# EAGLE board untitled (EAGLE 9.6.2)
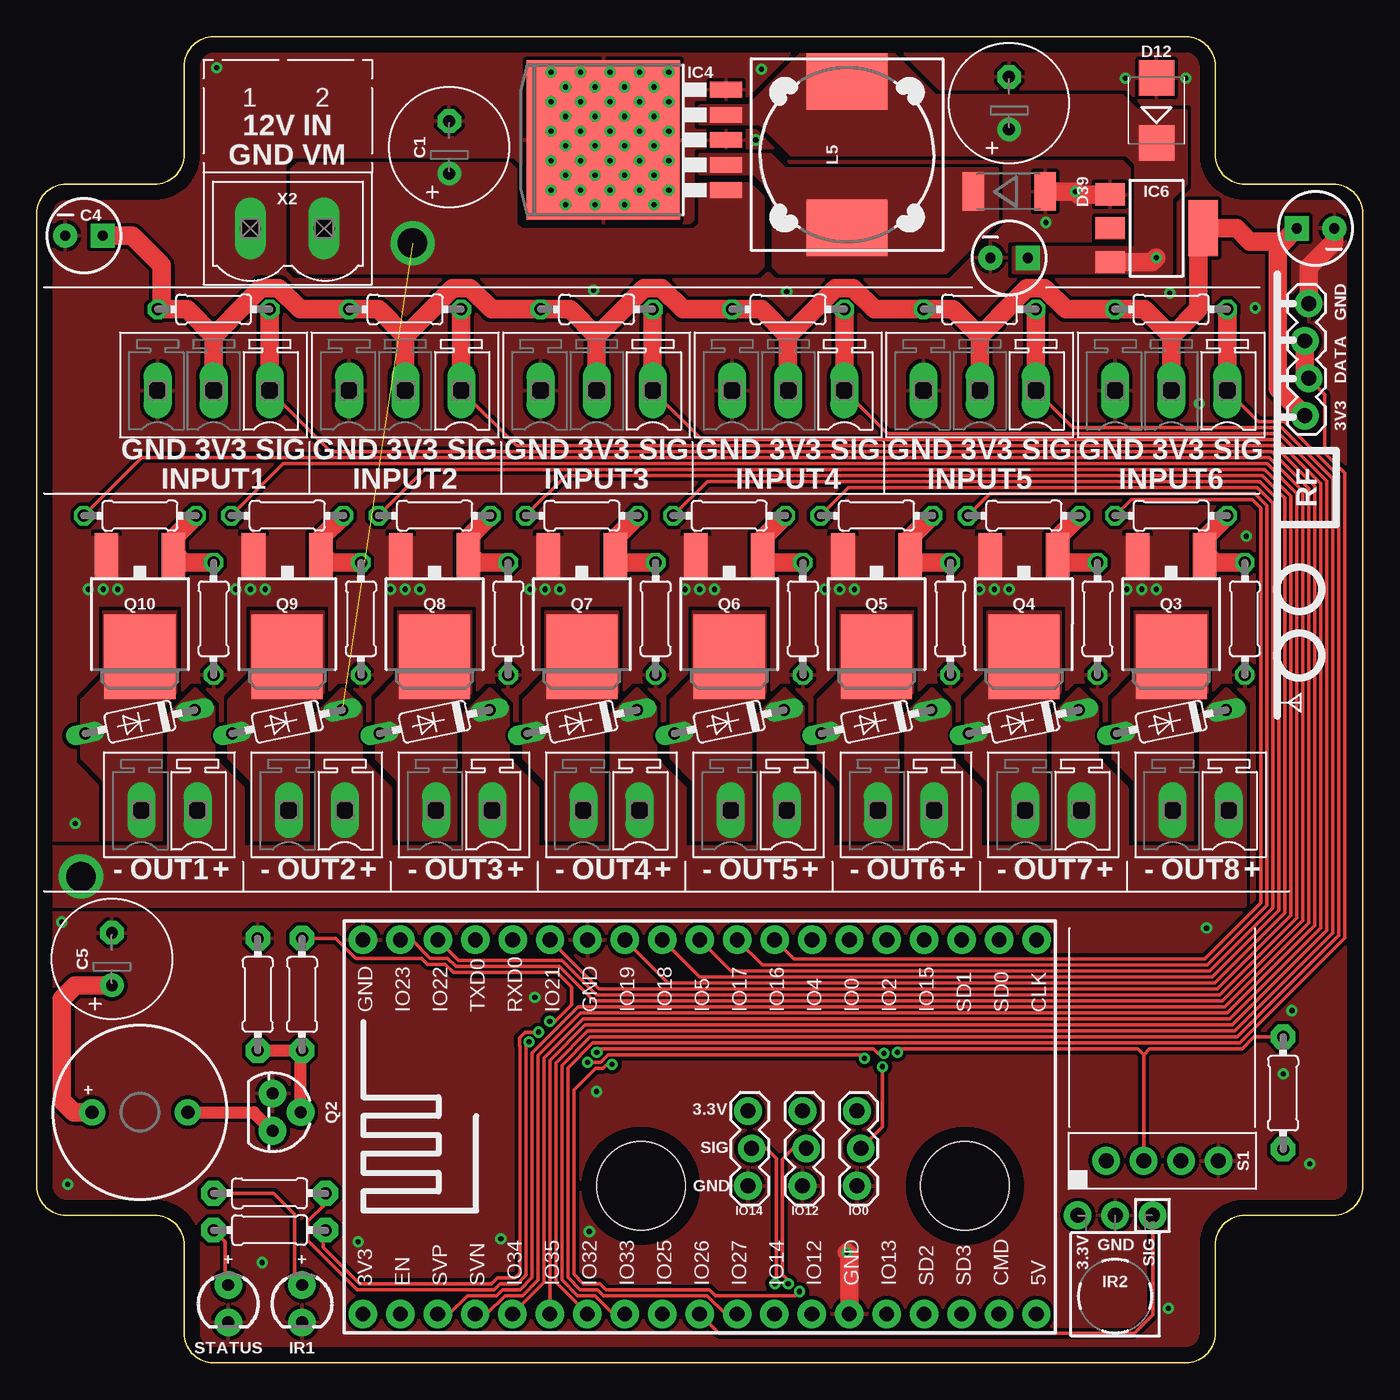
[diagram p0: board, top side]
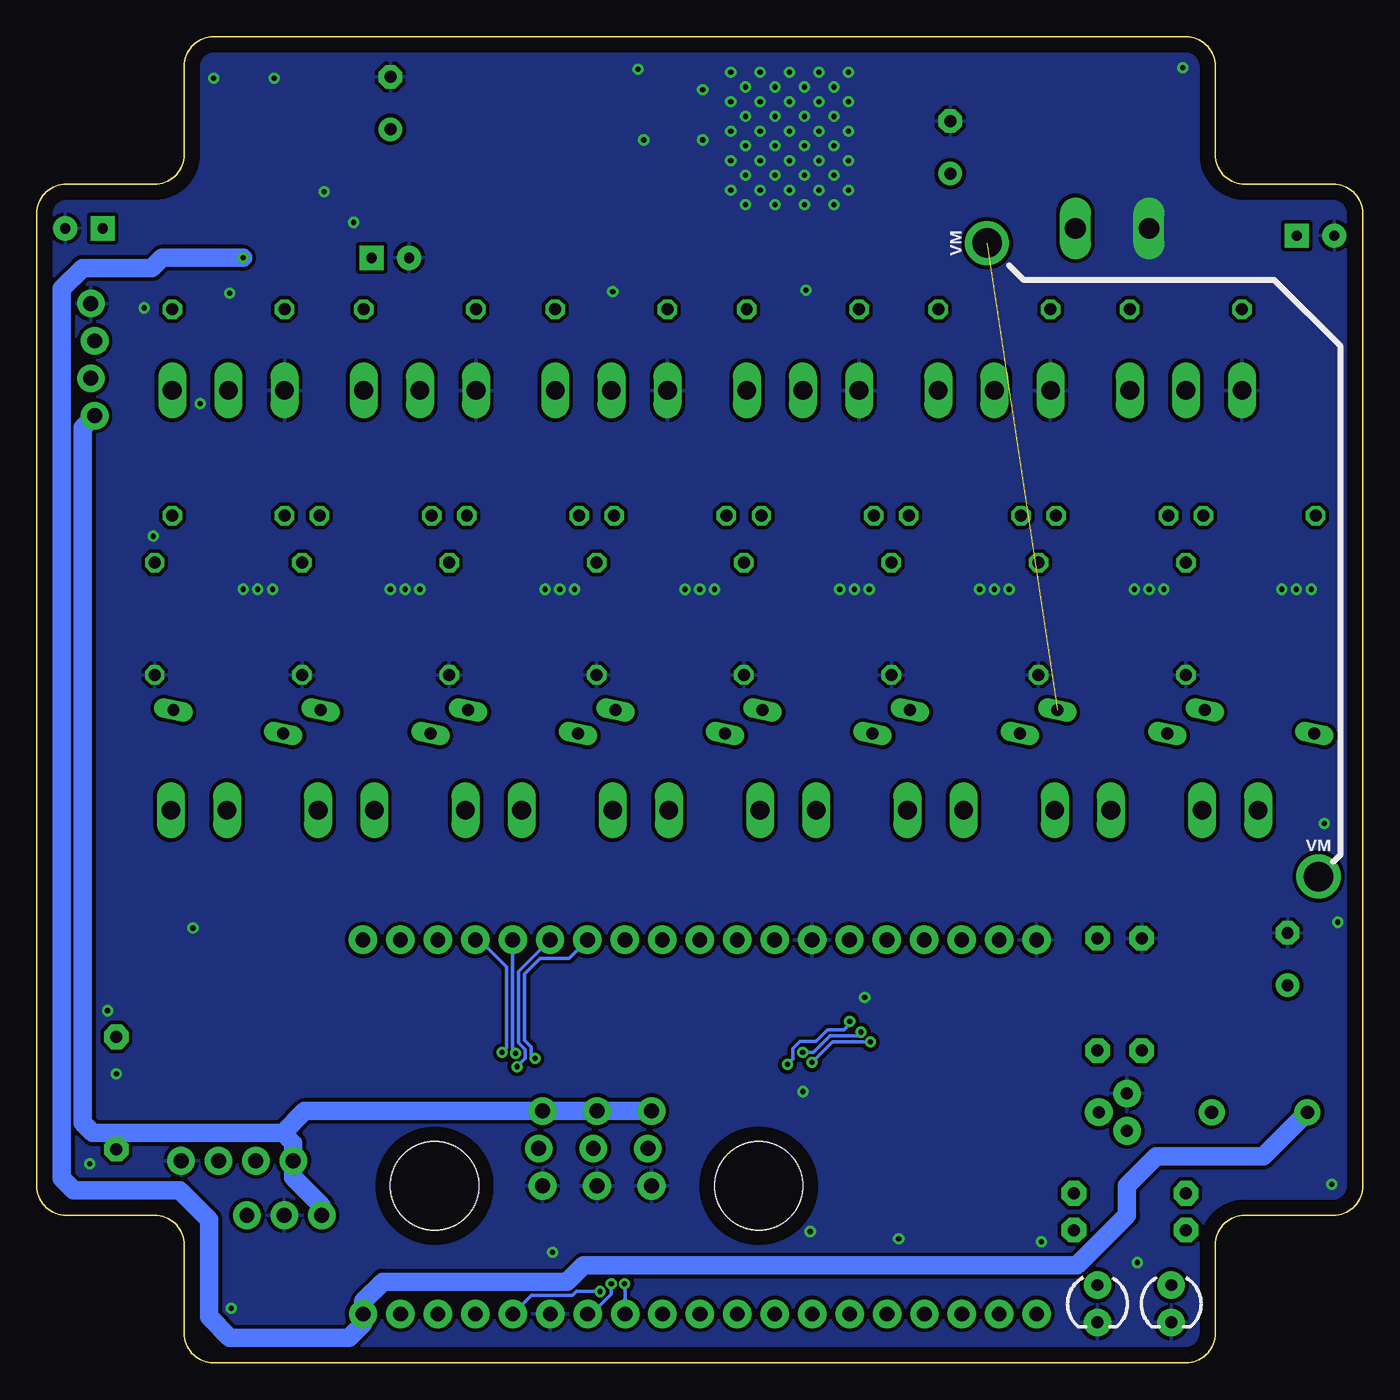
[diagram p1: board, bottom side, seen from below]

Size 90 x 90 mm. Coordinates in mm from the lower left corner, seen from the top.
Outline: 90,12 90,78 arc90 88,80 82,80 arc-90 80,82 80,88 arc90 78,90 12,90 arc90 10,88 10,82 arc-90 8,80 2,80 arc90 0,78 0,12
Outline: 90,12 arc-90 88,10
Outline: 2,10 arc-90 0,12
Outline: 73,0 17,0
Outline: 88,10 82,10 arc90 80,8 80,2 arc-90 78,0 12,0 arc-90 10,2 10,8 arc90 8,10 2,10
Outline: 90,12 arc-90 88,10
Outline: 2,10 arc-90 0,12
Copper layers (1*16): Top 0.035mm / dielectric 1.5mm / Bottom 0.035mm
Design rules "default": minimum track width 6mil, minimum drill 0.35mm, track to track 6mil, track to pad 6mil, pad to pad 6mil, via to via 6mil, smd to smd 6mil, copper to edge 40mil, drill to drill 6mil, minimum pad ring 10mil, minimum via ring 8mil, stop-mask expansion 4mil, vias tented up to drill 0mil, thermal gap 10mil
Net classes: 0 default: width 0.203 mm, clearance 0.152 mm
Holes 6 mm at 63,12 41,12

## Footprints (pad centres in the part's own frame; a part is rotated, then mirrored left to right if it is on the bottom)
E3,5-8 = drill 0.813 pad 1.6: + -1.778,0 | drill 0.813 pad 1.6 octagon: - 1.778,0
CPOL-RADIAL-10UF-25V = drill 0.7 pad 1.651 square: 1 1.27,0 | drill 0.7 pad 1.651: 2 -1.27,0
DO35-7 = drill 0.813 long: A 3.81,0; C -3.81,0
SMB = smd 2.4 x 2.4: A 2.2,0; C -2.2,0
SOD87 = smd 1.45 x 2.6: 1 -2.445,0; 2 2.445,0
TO263-5 = smd 1.067 x 2.159: 1 -3.404,-5.791; 2 -1.702,-5.791; 3 0,-5.791; 4 1.702,-5.791; 5 3.404,-5.791 | smd 10.8 x 10.41: 6 0,2.54
SOT223 = smd 1.5 x 2: 1 -2.3,-3.15; 2 0,-3.15; 3 2.3,-3.15 | smd 3.8 x 2: 4 0,3.15
MCV3 = drill 1.27 pad 1.905 long: 1 -3.81,0; 2 0,0; 3 3.81,0
1X03_LOCK = drill 1.016 pad 1.88: 1 0,0.127; 2 2.54,-0.127; 3 5.08,0.127
LED_3MM = drill 0.813 pad 1.88: A -1.27,0; K 1.27,0
BRM-2508_VERT = drill 1.016 pad 1.88: 1 -2.54,0; 2 0,0; 3 2.54,0
1X04_LOCK = drill 1.016 pad 1.88: 1 0,0.127; 2 2.54,-0.127; 3 5.08,0.127; 4 7.62,-0.127
DR127 = smd 3.85 x 5.5: 1 -4.975,0; 2 4.975,0
MCV2 = drill 1.27 pad 1.905 long: 1 -1.905,0; 2 1.905,0
BUZZER-12MM = drill 0.9 pad 1.778: + 3.25,0; - -3.25,0
TO-92 = drill 0.813 pad 1.88: 1 -1.27,0; 2 0,1.905; 3 1.27,0
DPAK = smd 1.6 x 3: 1 -2.28,-5.31; 3 2.28,-5.31 | smd 4.826 x 5.715: 4 0,1.588
0204/7 = drill 0.813 octagon: 1 -3.81,0; 2 3.81,0
0204/7' = drill 0.813 pad 1.676 octagon: 1 -3.81,0; 2 3.81,0
DHT11 = drill 1.016 pad 1.88: 1 -3.81,0; 2 -1.27,0; 3 1.27,0; 4 3.81,0
ESP32NODEMCU = drill 1 pad 1.93: 1 -22.87,-12.69; 2 -20.33,-12.69; 3 -17.79,-12.69; 4 -15.25,-12.69; 5 -12.71,-12.69; 6 -10.17,-12.69; 7 -7.63,-12.69; 8 -5.09,-12.69; 9 -2.55,-12.69; 10 -0.01,-12.69; 11 2.53,-12.69; 12 5.07,-12.69; 13 7.61,-12.69; 14 10.15,-12.69; 15 12.69,-12.69; 16 15.23,-12.69; 17 17.77,-12.69; 18 20.31,-12.69; 19 22.85,-12.69; 20 22.86,12.7; 21 20.32,12.7; 22 17.78,12.7; 23 15.24,12.7; 24 12.7,12.7; 25 10.16,12.7; 26 7.62,12.7; 27 5.08,12.7; 28 2.54,12.7; 29 0,12.7; 30 -2.54,12.7; 31 -5.08,12.7; 32 -7.62,12.7; 33 -10.16,12.7; 34 -12.7,12.7; 35 -15.24,12.7; 36 -17.78,12.7; 37 -20.32,12.7; 38 -22.86,12.7
MSTBV2 = drill 1.397 long: 1 -2.5,0; 2 2.5,0

## Placement (x,y rotation side)
C1  220µF 50V  [E3,5-8]  28,82.5 90 top
C2  220µF 50V  [E3,5-8]  66,85.5 90 top
C4  10uF  [CPOL-RADIAL-10UF-25V]  3.2,76.5 0 top
C5  220µF 50V  [E3,5-8]  5.1,27.4 90 top
C7  10uF  [CPOL-RADIAL-10UF-25V]  66,75 0 top
C8  10uF  [CPOL-RADIAL-10UF-25V]  86.8,77 180 top
D1  1N4148DO35-7  [DO35-7]  77,43.5 192 top
D3  1N4148DO35-7  [DO35-7]  67,43.5 192 top
D5  1N4148DO35-7  [DO35-7]  57,43.5 192 top
D6  1N4148DO35-7  [DO35-7]  47,43.5 192 top
D7  1N4148DO35-7  [DO35-7]  37,43.5 192 top
D8  1N4148DO35-7  [DO35-7]  27,43.5 192 top
D9  1N4148DO35-7  [DO35-7]  17,43.5 192 top
D10  1N4148DO35-7  [DO35-7]  7,43.5 192 top
D12  5.1VZ  [SMB]  76,85 90 top
D39  SS34  [SOD87]  66,79.5 0 top
IC4  LM2596HV-5  [TO263-5]  41,83 90 top
IC6  1117-33  [SOT223]  76,77 270 top
INPUT1  MCV3  [MCV3]  12,66 180 top
INPUT2  MCV3  [MCV3]  25,66 180 top
INPUT3  MCV3  [MCV3]  38,66 180 top
INPUT4  MCV3  [MCV3]  51,66 180 top
INPUT5  MCV3  [MCV3]  64,66 180 top
INPUT6  MCV3  [MCV3]  77,66 180 top
IO0  [1X03_LOCK]  55.8,12 90 top
IO12  [1X03_LOCK]  52.1,12 90 top
IO14  [1X03_LOCK]  48.4,12 90 top
IR1  [LED_3MM]  18,4 270 top
IR2  BRM-2A18VERT  [BRM-2508_VERT]  73.2,10 180 top
J2  [1X04_LOCK]  86.2,71.9 270 top
L5  33uH  [DR127]  55,82 90 top
OUT1  MCV2  [MCV2]  9,37.5 180 top
OUT2  MCV2  [MCV2]  19,37.5 180 top
OUT3  MCV2  [MCV2]  29,37.5 180 top
OUT4  MCV2  [MCV2]  39,37.5 180 top
OUT5  MCV2  [MCV2]  49,37.5 180 top
OUT6  MCV2  [MCV2]  59,37.5 180 top
OUT7  MCV2  [MCV2]  69,37.5 180 top
OUT8  MCV2  [MCV2]  79,37.5 180 top
PIEZO1-SMT  CBT-09427-SMT-TR PIEZO SPEAKER 2.5-4.5V  [BUZZER-12MM]  7,17 180 top
Q2  200mA/40V  [TO-92]  16,17 270 top
Q3  35A/25V/8.5mΩ  [DPAK]  77,49.5 180 top
Q4  35A/25V/8.5mΩ  [DPAK]  67,49.5 180 top
Q5  35A/25V/8.5mΩ  [DPAK]  57,49.5 180 top
Q6  35A/25V/8.5mΩ  [DPAK]  47,49.5 180 top
Q7  35A/25V/8.5mΩ  [DPAK]  37,49.5 180 top
Q8  35A/25V/8.5mΩ  [DPAK]  27,49.5 180 top
Q9  35A/25V/8.5mΩ  [DPAK]  17,49.5 180 top
Q10  35A/25V/8.5mΩ  [DPAK]  7,49.5 180 top
R1  P-UP  [0204/7]  25,71.5 0 top
R2  P-UP  [0204/7]  38,71.5 0 top
R3  P-UP  [0204/7]  51,71.5 0 top
R4  P-UP  [0204/7]  64,71.5 0 top
R5  P-UP  [0204/7]  12,71.5 0 top
R6  P-UP  [0204/7]  77,71.5 0 top
R9  10K  [0204/7']  84.6,18.3 90 top
R11  R-IRL  [0204/7']  15.8,11.5 0 top
R12  150R  [0204/7']  15.8,9 0 top
R44  10R  [0204/7]  7,57.5 0 top
R45  10R  [0204/7]  17,57.5 0 top
R46  10R  [0204/7]  27,57.5 0 top
R47  10R  [0204/7]  37,57.5 0 top
R51  10R  [0204/7]  47,57.5 0 top
R52  10R  [0204/7]  57,57.5 0 top
R54  10R  [0204/7]  67,57.5 0 top
R55  10R  [0204/7]  77,57.5 0 top
R56  100K  [0204/7]  82,50.5 270 top
R57  100K  [0204/7]  72,50.5 270 top
R63  100K  [0204/7]  62,50.5 270 top
R64  100K  [0204/7]  52,50.5 270 top
R66  100K  [0204/7]  42,50.5 270 top
R67  100K  [0204/7]  32,50.5 270 top
R72  100K  [0204/7]  22,50.5 270 top
R73  100K  [0204/7]  12,50.5 270 top
R88  100K  [0204/7']  15,25 90 top
R89  1K  [0204/7']  18,25 90 top
S1  DHT11  [DHT11]  76.4,13.7 0 top
STATUS  [LED_3MM]  13,4 270 top
U$1  ESP32NODEMCU  [ESP32NODEMCU]  45,16 0 top
X2  [MSTBV2]  17,77 0 top

## Library data of the parts
C1 C2 C5 R1-R6 = resistor
C4 C7 C8 = SparkFun
D1 D3 D5-D10 D12 = diode
D39 = semicon-smd-ipc
IC4 = linear
IC6 = v-reg
INPUT1-INPUT6 OUT1-OUT8 = con-phoenix-381_l
IO0 IO12 IO14 = SparkFun-Connectors
IR1 STATUS = SparkFun-LED; PROD_ID: DIO-08794
IR2 = SparkFun-Sensors; PROD_ID: COMP-12505
J2 = SparkFun-Connectors; PROD_ID: CONN-09696
L5 = inductors
PIEZO1-SMT = SparkFun-Electromechanical; PROD_ID: COMP-08253; SF_SKU: COM-07950
Q2 = SparkFun-DiscreteSemi; PROD_ID: TRANS-08447
Q3-Q10 = SparkFun-DiscreteSemi; PROD_ID: TRANS-09984
R9 R11 R12 R88 R89 = adafruit
R44-R47 R51 R52 R54-R57 R63 R64 R66 R67 R72 R73 = rcl; SPICEPREFIX: R
S1 = dht
U$1 = ESP32-NODEMCU
X2 = con-phoenix-500; OC_FARNELL: unknown; OC_NEWARK: unknown

## Nets
3.3V: C4.1 C8.1 IC6.4 INPUT1.2 INPUT2.2 INPUT3.2 INPUT4.2 INPUT5.2 INPUT6.2 IO0.3 IO12.3 IO14.3 IR2.3 J2.4 R1.1 R2.1 R3.1 R4.1 R5.1 R6.1 R9.1 S1.1
5V: C2.+ C5.+ C7.1 D12.C IC4.4 IC6.3 L5.2 PIEZO1-SMT.+ U$1.19
BEEPER: R89.2 U$1.15
BEEPER-GND: PIEZO1-SMT.- Q2.3
CT-SENSOR: U$1.9
DHT11: R9.2 S1.2 U$1.23
DIO1: INPUT1.1 R5.2 U$1.3
DIO2: INPUT2.1 R1.2 U$1.4
DIO3: INPUT3.1 R2.2 U$1.5
DIO4: INPUT4.1 R3.2 U$1.6
DIO5: INPUT5.1 R4.2 U$1.7
DIO6: INPUT6.1 R6.2 U$1.8
GND: C1.- C2.- C4.2 C5.- C7.2 C8.2 D12.A D39.2 IC4.3 IC4.5 IC4.6 IC6.1 INPUT1.3 INPUT2.3 INPUT3.3 INPUT4.3 INPUT5.3 INPUT6.3 IO0.1 IO12.1 IO14.1 IR1.K IR2.2 J2.1 Q2.1 Q3.3 Q4.3 Q5.3 Q6.3 Q7.3 Q8.3 Q9.3 Q10.3 R56.2 R57.2 R63.2 R64.2 R66.2 R67.2 R72.2 R73.2 R88.2 S1.4 STATUS.K U$1.14 U$1.32 U$1.38 X2.1
IO2_STATUS_LED: R12.2 U$1.24
IRRECV: IR2.1 U$1.10
IRSEND: R11.2 U$1.26
N$1: R12.1 STATUS.A
N$2: IO0.2 U$1.25
N$3: IO12.2 U$1.13
N$4: IO14.2 U$1.12
N$7: D9.A OUT2.2 Q9.4
N$8: IR1.A R11.1
N$11: Q2.2 R88.1 R89.1
N$16: Q10.1 R44.2 R73.1
N$18: Q9.1 R45.2 R72.1
N$19: Q8.1 R46.2 R67.1
N$23: Q7.1 R47.2 R66.1
N$27: Q6.1 R51.2 R64.1
N$31: Q5.1 R52.2 R63.1
N$35: Q4.1 R54.2 R57.1
N$37: Q3.1 R55.2 R56.1
N$41: D1.A OUT8.2 Q3.4
N$42: D3.A OUT7.2 Q4.4
N$43: D5.A OUT6.2 Q5.4
N$44: D6.A OUT5.2 Q6.4
N$45: D7.A OUT4.2 Q7.4
N$46: D10.A OUT1.2 Q10.4
N$47: D8.A OUT3.2 Q8.4
N$164: D39.1 IC4.2 L5.1
OUT1: R44.1 U$1.37
OUT2: R45.1 U$1.36
OUT3: R46.1 U$1.33
OUT4: R47.1 U$1.31
OUT5: R51.1 U$1.30
OUT6: R52.1 U$1.29
OUT7: R54.1 U$1.28
OUT8: R55.1 U$1.27
RF-DATA: J2.2 J2.3 U$1.11
VM: C1.+ D1.C D3.C D5.C D6.C D7.C D8.C D9.C D10.C IC4.1 OUT1.1 OUT2.1 OUT3.1 OUT4.1 OUT5.1 OUT6.1 OUT7.1 OUT8.1 X2.2

## Tracks (layer width: path | path; a pad name or v marks a point on that pad's centre or on a via)
3.3V
  Top 1.27: INPUT1.2 12,69.69 | 12,69.69 10.19,71.5 R5.1 8.47,71.78 8.47,74.5 6.47,76.5 C4.1 | INPUT2.2 25,69.69 | 25,69.69 23.19,71.5 R1.1 17.86,71.5 16.41,72.95 15.21,72.95 14.36,72.1 14.36,72.05 12,69.69 | INPUT3.2 38,69.69 | 38,69.69 36.19,71.5 R2.1 30.86,71.5 29.41,72.95 28.21,72.95 27.36,72.1 27.36,72.05 25,69.69 | INPUT4.2 51,69.69 | 51,69.69 49.19,71.5 R3.1 43.86,71.5 42.41,72.95 41.21,72.95 40.36,72.1 40.36,72.05 38,69.69 | INPUT5.2 64,69.69 | 64,69.69 62.19,71.5 R4.1 56.86,71.5 55.41,72.95 54.21,72.95 53.36,72.1 53.36,72.05 51,69.69 | 77,69.69 75.19,71.5 R6.1 69.86,71.5 68.41,72.95 67.21,72.95 66.36,72.1 66.36,72.05 64,69.69 | J2.4 84.23,66.12 84.23,75.7 C8.1 84.63,76.1 82.35,76.1 81.45,77 IC6.4 78.85,76.7 78.85,71.5 77.04,69.69 77,69.69 | 77,69.69 INPUT6.2
  Bottom 1.27: IR2.3 70.66,10.66 72.59,12.59 S1.1 72.59,14.9 73.29,15.6 | J2.4 86.88,63.48 86.88,16.28 86.2,15.6 84.6,15.6 | 84.6,15.6 73.29,15.6 | R9.1 84.6,15.6 | IO14.3 IO12.3 IO0.3 71.81,17.08 73.29,15.6
5V  (via drill 0.35)
  Top 1.27: IC6.3 75.7,74.7 v76,75 | C5.+ 2.62,25.62 1.7,24.7 1.7,17.8 2.5,17 PIEZO1-SMT.+
  Bottom 1.27: v76,75 81.5,75 82.2,74.3 86.9,74.3 88.3,72.9 88.3,12.5 87.5,11.7 80.3,11.7 78.3,9.7 78.3,3.1 76.9,1.7 68.8,1.7 67.85,2.65 U$1.19 67.85,4.15 66.5,5.5 54,5.5 52.9,6.6 19.4,6.6 16,10 16,12 14,14 6.75,14 PIEZO1-SMT.+
  pour Top (no thermals): 45,84.1 49.1,84.1 51.2,82 74,82 74.6,81.4 74.6,75.7 66.3,75.7 66.3,74 77,74 77,79 78,80 78,85 74.7,85 73.7,86 61,86 58.1,88.9 51.9,88.9 48.3,85.3 45,85.3
BEEPER  (via drill 0.35)
  Top 0.254: v39.05,20.24 38.7,20.24 38.45,19.99 37.92,19.99 36.46,18.53 36.46,6 37.09,5.37 38.22,5.37 38.63,4.96 45.67,4.96 46.08,4.55 51.49,4.55 v51.77,4.83 | R89.2 20.27,28.81 21.62,27.45 26.13,27.45 26.54,27.05 27.72,27.05 28.28,26.49 35.33,26.49 36.3,25.52 36.3,24.3 35.18,23.18 v34.82,23.18
  Bottom 0.254: v39.05,20.24 38.66,20.63 38.66,21.32 38.19,21.8 37.12,21.8 36.33,22.59 35.2,22.59 34.82,22.97 v34.82,23.18 | v51.77,4.83 53.38,4.83 53.62,4.59 56.41,4.59 U$1.15
BEEPER-GND
  Top 0.813: PIEZO1-SMT.- 14.73,17 Q2.3
DHT11  (via drill 0.35)
  Top 0.254: v58.41,21.05 58.66,21.3 74.73,21.3 75.13,20.9 | R9.2 82.62,22.1 81.83,21.3 75.53,21.3 75.13,20.9 | S1.2 75.13,20.9
  Bottom 0.254: U$1.23 59.94,28.7 58.11,26.87 58.11,21.36 v58.41,21.05
DIO1
  Top 0.254: INPUT1.1 19.96,61.85 83.85,61.85 86.35,59.35 86.35,29.85 80.65,24.15 36.73,24.15 33.61,21.04 33.61,5.78 32.79,4.96 31.61,4.96 31.2,4.55 29.23,4.55 27.99,3.31 U$1.3
  Top 1.27: INPUT1.1 R5.2
DIO2
  Top 0.254: INPUT2.1 32.55,62.26 84.02,62.26 86.76,59.52 86.76,29.68 80.81,23.74 36.89,23.74 34.02,20.87 34.02,5.61 32.96,4.55 31.77,4.55 30.53,3.31 U$1.4
  Top 1.27: INPUT2.1 R1.2
DIO3
  Top 0.254: INPUT3.1 45.15,62.66 84.18,62.66 87.16,59.68 87.16,29.52 80.98,23.34 37.06,23.34 34.42,20.7 34.42,5.44 U$1.5
  Top 1.27: INPUT3.1 R2.2
DIO4
  Top 0.254: INPUT4.1 57.74,63.07 84.35,63.07 87.57,59.85 87.57,29.35 81.15,22.93 37.23,22.93 34.83,20.53 U$1.6
  Top 1.27: INPUT4.1 R3.2
DIO5
  Top 0.254: INPUT5.1 70.33,63.48 84.52,63.48 87.98,60.02 87.98,29.18 81.32,22.52 37.4,22.52 35.24,20.36 35.24,5.44 U$1.7
  Top 1.27: INPUT5.1 R4.2
DIO6
  Top 0.254: INPUT6.1 82.93,63.88 84.69,63.88 88.38,60.19 88.38,29.01 81.49,22.12 37.57,22.12 35.64,20.19 35.64,5.61 36.7,4.55 37.89,4.55 39.13,3.31 U$1.8
  Top 1.27: INPUT6.1 R6.2
GND  (via drill 0.35)
  Top 1.27: J2.1 86.33,74.36 88.07,76.1 C8.2 | D39.2 v70.5,79.5 70.7,79.3 IC6.1 | U$1.14 55.15,7.35 v55,7.5
  other vias: 4.5,52.5 5.5,52.5 3.5,52.5 14.5,52.5 15.5,52.5 13.5,52.5 25,52.5 24,52.5 26,52.5 34.5,52.5 35.5,52.5 33.5,52.5 44,52.5 45,52.5 46,52.5 54.5,52.5 53.5,52.5 55.5,52.5 65,52.5 64,52.5 66,52.5 74,52.5 75,52.5 76,52.5 82.1,56.1 82.7,71.6 78.9,65.1 76.9,72.6 50.9,72.7 37.8,72.8 33.8,24.8 38,18.4 31.5,8.4 37.5,8.9 76.8,3.7 86.4,13.5 84.6,19.6 79.4,29.5 1.7,29.9 2.1,12.1 15.3,6.8 21.8,8.2 2.6,36.6 12.2,87.9 78,87.2 73.9,87.2 68.5,77.4 48.8,83 44.8,83 44.8,86.4 49.2,87.8 42.9,87.6 42.9,85.6 42.9,83.6 42.9,81.6 42.9,79.6 41.9,80.6 41.9,78.6 41.9,82.6 41.9,84.6 41.9,86.6 40.9,87.6 40.9,85.6 40.9,83.6 40.9,81.6 40.9,79.6 39.9,78.6 39.9,80.6 39.9,82.6 39.9,84.6 39.9,86.6 38.9,87.6 38.9,85.6 38.9,83.6 38.9,81.6 38.9,79.6 37.9,78.6 37.9,80.6 37.9,82.6 37.9,84.6 37.9,86.6 36.9,87.6 36.9,85.6 36.9,83.6 36.9,81.6 36.9,79.6 35.9,78.6 35.9,80.6 35.9,82.6 35.9,84.6 35.9,86.6 34.9,87.6 34.9,85.6 34.9,83.6 34.9,81.6 34.9,79.6 85.2,23.9
  pour Top (isolate 0.254, rank 6): 2,80 8,80 arc90 10,82 10,88 arc-90 12,90 78,90 arc-90 80,88 80,82 arc90 82,80 88,80 arc-90 90,78 90,12 arc-90 88,10 82,10 arc90 80,8 80,2 arc-90 78,0 12,0 arc-90 10,2 10,8 arc90 8,10 2,10 arc-90 0,12 0,78 arc-90
  pour Bottom (isolate 0.254, rank 6): 2,80 8,80 arc90 10,82 10,88 arc-90 12,90 78,90 arc-90 80,88 80,82 arc90 82,80 88,80 arc-90 90,78 90,12 arc-90 88,10 82,10 arc90 80,8 80,2 arc-90 78,0 12,0 arc-90 10,2 10,8 arc90 8,10 2,10 arc-90 0,12 0,78 arc-90
  pour Top (isolate 0.254, no thermals): 3,52 6,52 6,56 3,56
  pour Top (isolate 0.254, no thermals): 13,52 16,52 16,56 13,56
  pour Top (isolate 0.254, no thermals): 23.5,52 26.5,52 26.5,56 23.5,56
  pour Top (isolate 0.254, no thermals): 33,52 36,52 36,56 33,56
  pour Top (isolate 0.254, no thermals): 43.5,52 46.5,52 46.5,56 43.5,56
  pour Top (isolate 0.254, no thermals): 53,52 56,52 56,56 53,56
  pour Top (isolate 0.254, no thermals): 63.5,52 66.5,52 66.5,56 63.5,56
  pour Top (isolate 0.254, no thermals): 73.5,52 76.5,52 76.5,56 73.5,56
  pour Top (isolate 0.254, no thermals): 13,74.5 16,74.5 16,79.5 13,79.5
  pour Bottom (isolate 0.254, no thermals): 13,74.5 16,74.5 16,79.5 13,79.5
IO2_STATUS_LED  (via drill 0.35)
  Top 0.254: v57.5,21 57.1,21 56.8,21.3 38.26,21.3 v38.01,21.05 | v34.05,22.43 33.15,22.43 32.77,22.05 32.77,21.5 32.8,21.47 32.8,6.12 32.45,5.77 31.27,5.77 30.86,5.37 21.91,5.37 19.44,7.84 19.44,8.83 R12.2
  Bottom 0.254: U$1.24 57.7,21.2 v57.5,21 | v34.05,22.43 34.3,22.18 36.17,22.18 37.3,21.05 v38.01,21.05
IRRECV
  Top 0.254: U$1.10 46.3,2 74.5,2 75.74,3.24 IR2.1
IRSEND  (via drill 0.35)
  Top 0.254: v37.39,20.39 v37.4,20.39 38.28,20.39 38.78,20.9 55.5,20.9 55.93,20.9 v56.19,20.65 | v33.42,21.78 33.2,21.56 33.2,5.95 32.62,5.37 31.44,5.37 31.03,4.96 29.07,4.96 21.74,4.96 18.4,8.3 18.4,9.59 19.61,10.8 R11.2
  Bottom 0.254: v33.42,21.78 36,21.78 v37.39,20.39 | U$1.26 53.87,27.45 55.83,27.45 56.89,26.4 56.89,21.89 56.44,21.44 56.44,20.9 v56.19,20.65
N$1
  Top 0.254: STATUS.A 13,5.57 12.8,5.77 12.8,8.19 R12.1
N$2  (via drill 0.35)
  Top 0.254: v57.4,20.09 57.4,16.01 IO0.2
  Bottom 0.254: U$1.25 57.29,26.57 57.29,21.72 56.84,21.27 56.84,20.65 v57.4,20.09
N$3  (via drill 0.35)
  Top 0.254: v51.01,5.36 51.01,5.58 50.61,5.98 50.61,13.82 51.33,14.54 IO12.2
  Bottom 0.254: U$1.13 52.36,3.31 51.01,4.66 v51.01,5.36
N$4  (via drill 0.35)
  Top 0.254: v50.1,5.36 50.2,5.46 50.2,13.87 49.53,14.54 IO14.2
  Bottom 0.254: U$1.12 50.07,5.33 v50.1,5.36
N$7
  pour Top (no thermals): 14.5,51 14.5,46.5 13,45 13,41 14.5,39.5 14.5,35.5 18.5,35.5 18.5,44.5 19.5,45.5 19.5,51
N$8
  Top 0.254: IR1.A 17.5,5.77 17.5,10.07 16.07,11.5 R11.1
N$11
  Top 0.813: Q2.2 17.91,21.09 | 17.91,21.09 R89.1 | R88.1 17.81,21.19 17.91,21.09
N$16
  Top 0.254: Q10.1 9.28,55 9.28,55.97
  Top 1.27: 9.28,55.97 R44.2 | R73.1 9.97,54.31 9.28,55
N$18
  Top 0.254: Q9.1 19.28,55
  Top 1.27: R45.2 19.28,55.97 19.28,55 19.97,54.31 R72.1
N$19
  Top 0.254: Q8.1 29.28,55
  Top 1.27: R46.2 29.28,55.97 29.28,55 29.97,54.31 R67.1
N$23
  Top 1.27: R47.2 39.28,55.97 Q7.1 39.78,54.31 R66.1
N$27
  Top 1.27: R51.2 49.28,55.97 Q6.1 49.78,54.31 R64.1
N$31
  Top 1.27: R52.2 59.28,55.97 Q5.1 59.78,54.31 R63.1
N$35
  Top 1.27: R54.2 69.28,55.97 Q4.1 69.78,54.31 R57.1
N$37
  Top 1.27: Q3.1 79.28,55 | 79.28,55 79.28,55.97 R55.2 | R56.1 79.97,54.31 79.28,55
N$41
  pour Top (no thermals): 74.5,51 74.5,46.5 73,45 73,41 74.5,39.5 74.5,35.5 78.5,35.5 78.5,44.5 79.5,45.5 79.5,51
N$42
  pour Top (no thermals): 64.5,51 64.5,46.5 63,45 63,41 64.5,39.5 64.5,35.5 68.5,35.5 68.5,44.5 69.5,45.5 69.5,51
N$43
  pour Top (no thermals): 54.5,51 54.5,46.5 53,45 53,41 54.5,39.5 54.5,35.5 58.5,35.5 58.5,44.5 59.5,45.5 59.5,51
N$44
  pour Top (no thermals): 44.5,51 44.5,46.5 43,45 43,41 44.5,39.5 44.5,35.5 48.5,35.5 48.5,44.5 49.5,45.5 49.5,51
N$45
  pour Top (no thermals): 34.5,51 34.5,46.5 33,45 33,41 34.5,39.5 34.5,35.5 38.5,35.5 38.5,44.5 39.5,45.5 39.5,51
N$46
  pour Top (no thermals): 4.5,51 4.5,46.5 3,45 3,41 4.5,39.5 4.5,35.5 8.5,35.5 8.5,44.5 9.5,45.5 9.5,51
N$47
  pour Top (no thermals): 24.5,51 24.5,46.5 23,45 23,41 24.5,39.5 24.5,35.5 28.5,35.5 28.5,44.5 29.5,45.5 29.5,51
N$164
  pour Top (no thermals): 45,82 49.8,82 50.8,81 65.2,81 65.2,77.5 61.7,74 50.4,74 50,74.4 50,79.4 48.7,80.7 45,80.7
OUT1
  Top 0.254: R44.1 7.13,61.45 83.68,61.45 85.94,59.18 85.94,30.02 80.48,24.55 37.84,24.55 35.5,26.89 28.45,26.89 27.89,27.45 26.7,27.45 25.46,28.7 U$1.37
OUT2
  Top 0.254: R45.1 16.73,61.04 83.51,61.04 85.54,59.01 85.54,30.19 80.31,24.96 39.6,24.96 39.46,24.96 38,24.96 35.66,27.3 28.62,27.3 U$1.36
OUT3
  Top 0.254: R46.1 26.32,60.63 83.34,60.63 85.13,58.84 85.13,30.36 80.14,25.37 38.17,25.37 U$1.33
OUT4
  Top 0.254: R47.1 35.92,60.23 83.17,60.23 84.73,58.67 84.73,30.53 79.97,25.77 42.85,25.77 U$1.31
OUT5
  Top 0.254: R51.1 45.51,59.82 83,59.82 84.32,58.51 84.32,30.7 79.81,26.18 44.98,26.18 U$1.30
OUT6
  Top 0.254: R52.1 55.1,59.41 82.84,59.41 83.91,58.34 83.91,30.86 79.64,26.59 47.11,26.59 U$1.29
OUT7
  Top 0.254: R54.1 64.7,59.01 82.67,59.01 83.51,58.17 83.51,31.03 79.47,26.99 49.25,26.99 U$1.28
OUT8
  Top 0.254: R55.1 74.29,58.6 82.5,58.6 83.1,58 83.1,31.2 79.3,27.4 51.38,27.4 U$1.27
RF-DATA
  Top 0.254: J2.3 87.43,65.72 87.43,61.75 88.79,60.39 88.79,28.84 81.66,21.71 37.73,21.71 36.05,20.02 36.05,5.78 36.87,4.96 38.05,4.96 38.46,4.55 45.51,4.55 46.75,3.31 U$1.11
  Top 1.27: J2.2 86.07,67.07 J2.3
VM  (via drill 2)  (1 unrouted)
  other vias: 25.5,76 3,33
  pour Top (no thermals): 45,80 48.4,80 49.3,79.1 49.3,74.4 48.9,74 17.7,74 17.3,74.4 17.3,81 17.7,81.4 32.1,81.4 32.5,81 32.5,77.3 32.9,76.9 44.6,76.9 45,77.3
  pour Top (no thermals): 82,31 0,31 0,35 9,35 9,44 10.75,45.75 12,44.5 12,41 14,39 14,35 19,35 19,44 20.75,45.75 22,44.5 22,41 24,39 24,35 29,35 29,44 30.75,45.75 32,44.5 32,41 34,39 34,35 39,35 39,44 40.75,45.75 42,44.5 42,41 44,39 44,35 49,35 49,44 50.75,45.75 52,44.5 52,41 54,39 54,35 59,35 59,44 60.75,45.75 62,44.5 62,41 64,39 64,35 69,35 69,44 70.75,45.75 72,44.5 72,41 74,39 74,35 79,35 79,44 80.75,45.75 82,44.5

## Text on the board
tPlace: 12V IN | GND VM | GND | DATA | 3V3 | GND 3V3 SIG | GND 3V3 SIG | GND 3V3 SIG | GND 3V3 SIG | GND 3V3 SIG | GND 3V3 SIG | RF | - | + | - | + | - | + | - | + | - | + | - | + | - | + | - | + | + | 3.3V | SIG | GND | 3.3V | GND | SIG | + | +
bPlace: VM | VM